# Altium PCB ADAS_ECU_MB_revA.PcbDoc (part 5 of 6)
Units mm, origin at the board's own origin, x right, y up, seen from the top; angles counter-clockwise.
Board outline 180 x 120 mm, 6 copper layers (Top Layer, Mid Layer 1, Mid Layer 2, Mid Layer 3, Mid Layer 4, Bottom Layer), stack 1.554 mm thick; 648 components, 505 nets, 4389 pads, 80 vias.
Unrouted connection lines stored in the file: 197.
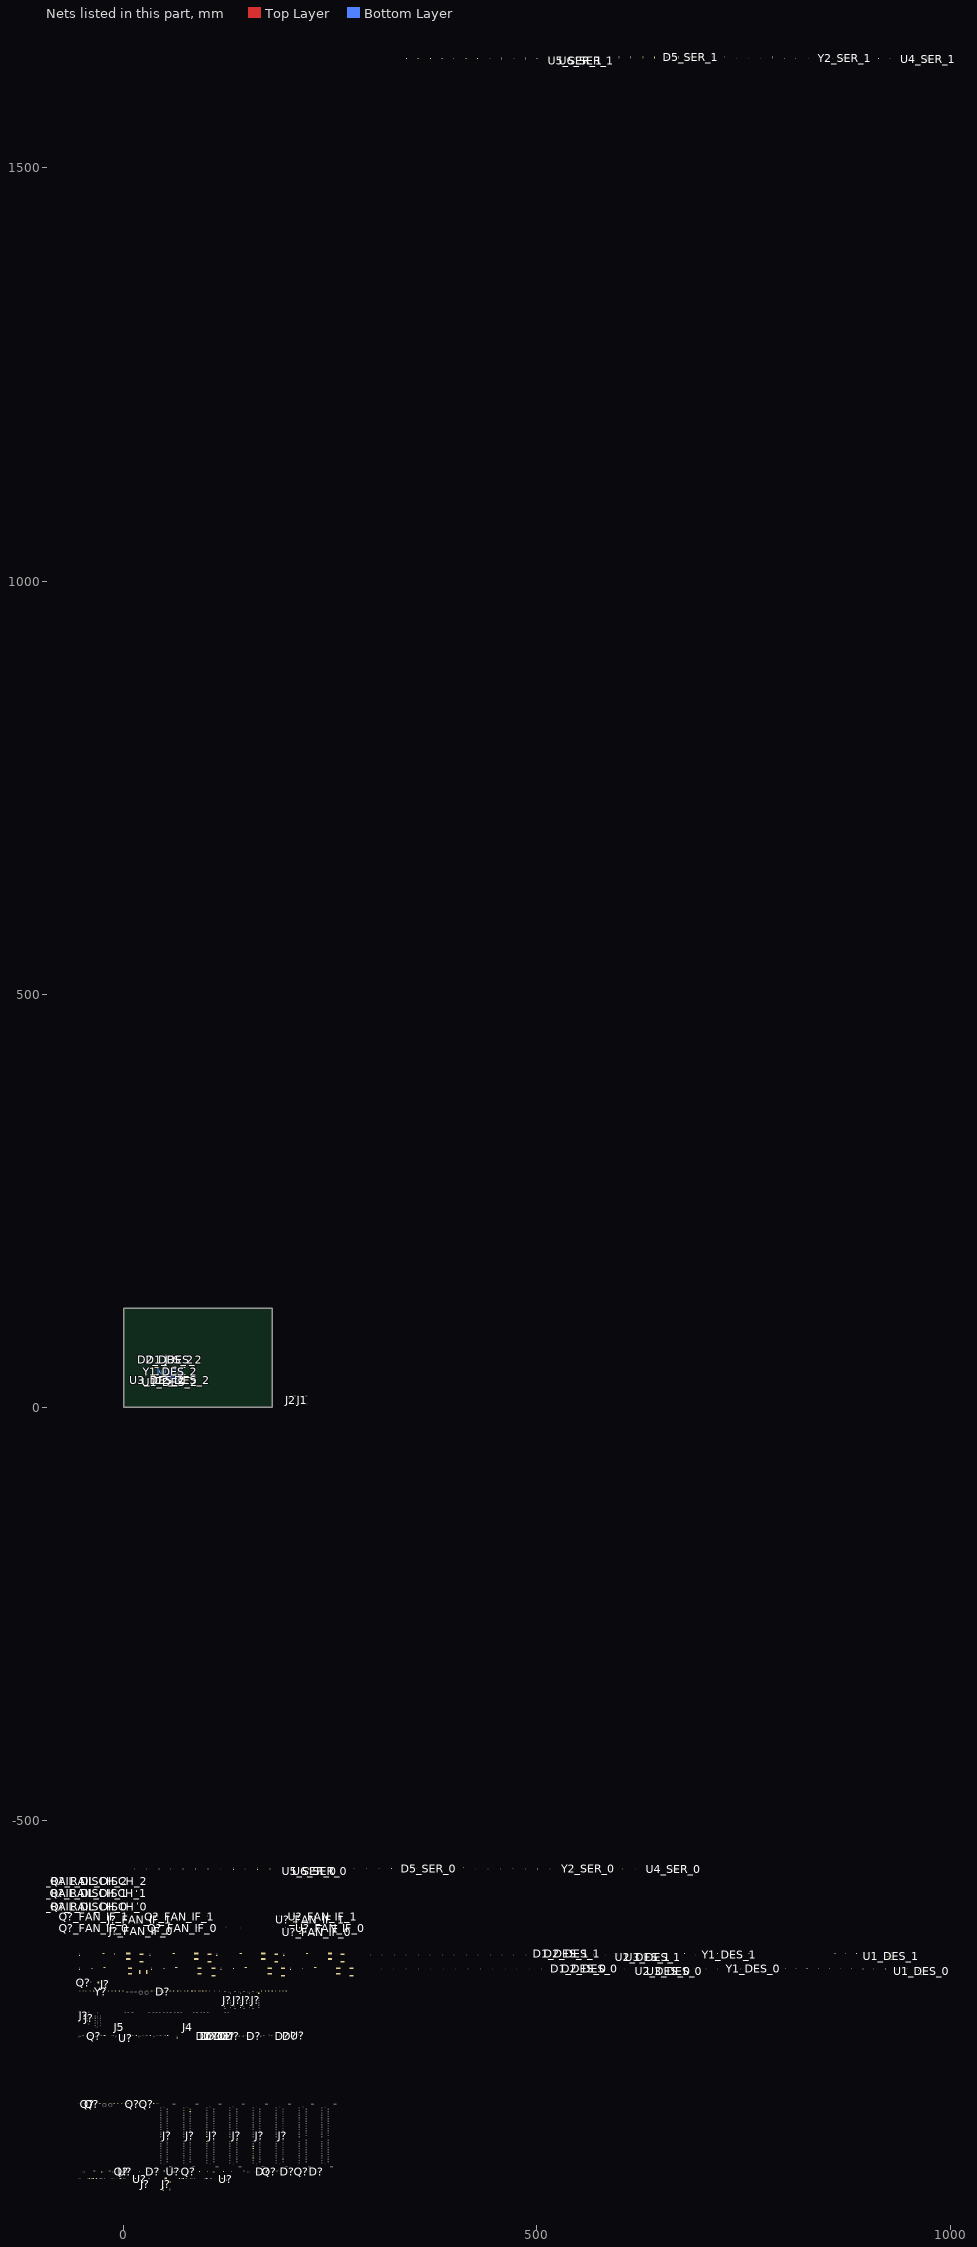
[diagram p4: the nets of this part, all layers, seen from the top]

## Via types
v1: diameter 0.5, hole 0.2, Top Layer to Bottom Layer, 66 vias
v2: diameter 0.5, hole 0.3, Top Layer to Bottom Layer, 12 vias
v3: diameter 0.75, hole 0.5, Top Layer to Bottom Layer, 2 vias

## Nets (pads, with @x,y where several pads share a name; then routed paths per layer and width w, separated by ;. In a path a pad name is that pad's centre, name@x,y a point inside that pad or via, vN(x,y) a via of type N, cw(c..) or ccw(c..) an arc to the next point about the centre after c; other vN are vias at no path point) (continued)
HDMI_D0_P: D?.1@198.211,-924.081 D?.10@199.046,-924.081 J?.7@-44.452,-737.871 R?.2@268.128,-924.081
HDMI_D1_N: D?.5@233.211,-926.081 D?.6@234.046,-926.081 J?.6@-44.452,-737.371 R?.2@276.128,-924.081
HDMI_D1_P: D?.4@233.211,-925.581 D?.7@234.046,-925.581 J?.4@-44.452,-736.371 R?.2@285.128,-924.081
HDMI_D2_N: D?.2@233.211,-924.581 D?.9@234.046,-924.581 R?.2@294.128,-924.081
HDMI_D2_P: D?.1@233.211,-924.081 D?.10@234.046,-924.081 J?.1@-44.452,-734.871 R?.2@302.128,-924.081
HDMI_HP_DET: C?.2@141.058,-924.081 D?.5@168.211,-926.081 D?.6@169.046,-926.081 J?.19@-44.452,-743.871 R?.2@155.128,-924.081
HDMI_nSLEEP: R?.2@7.353,-925.081 U?.5@60.753,-925.081
HDMI_SCL: D?.2@168.211,-924.581 D?.9@169.046,-924.581 J?.15@-44.452,-741.871 R?.2@181.128,-924.081
HDMI_SDA: D?.4@168.211,-925.581 D?.7@169.046,-925.581 J?.16@-44.452,-742.371 R?.2@220.128,-924.081
I2C0_SCL: D?.4@118.211,-761.581 D?.7@119.046,-761.581 J?.185@156.528,-895.706
I2C0_SDA: D?.5@118.211,-762.081 D?.6@119.046,-762.081 J?.187@156.528,-896.206
I2C1_SCL: J?.189@156.528,-896.706
I2C1_SDA: J?.191@156.528,-897.206
I2C_IO_VCC: C?.2@193.995,-924.081 Q?.1@175.678,-924.431 Q?.1@214.678,-924.431 R?.1@202.128,-924.081 R?.1@206.128,-924.081 R?.2@186.278,-924.081 R?.2@225.278,-924.081
I2S0_DIN: D?.2@96.211,-760.581 D?.9@97.046,-760.581 J?.195@156.528,-898.206 TP?.1@85.628,-759.081
I2S0_DOUT: D?.1@96.211,-760.081 D?.10@97.046,-760.081 J?.193@156.528,-897.706 TP?.1@79.628,-759.081
I2S0_FS: D?.4@96.211,-761.581 D?.7@97.046,-761.581 J?.197@156.528,-898.706 TP?.1@67.628,-759.081
I2S0_SCLK: D?.5@96.211,-762.081 D?.6@97.046,-762.081 J?.199@156.528,-899.206 TP?.1@57.628,-759.081
INT_VCC: F?_FAN_IF_0.1 F?_FAN_IF_1.1 J?.1@26.178,-934.081 J?.2@26.178,-936.081
MFP6_DES_0: R5_DES_0.1 R7_DES_0.2 U1_DES_0.25
MFP6_DES_1: R5_DES_1.1 R7_DES_1.2 U1_DES_1.25
MFP6_DES_2: R5_DES_2.1 R7_DES_2.2 U1_DES_2.25 | length 5.2
  Bottom Layer w0.2: U1_DES_2.25@59.977,32.003 60.225,32.25 62.25,32.25 62.75,31.75 63.75,31.75 R7_DES_2.2@64.54,32.54
MODULE_ID: J?.217@156.528,-903.706 R?.1@5.128,-842.081
nERRB_DES_0: U1_DES_0.14
nERRB_DES_1: U1_DES_1.14
nERRB_DES_2: U1_DES_2.14 | length 1.3
  Bottom Layer w0.2: U1_DES_2.14@55.558,35.538 55.558,35.552 55.274,35.836 55.274,36.024 v2(55.75,36.5)
NetC3_DES_0_2: C3_DES_0.2 R3_DES_0.2
NetC3_DES_1_2: C3_DES_1.2 R3_DES_1.2
NetC3_DES_2_2: C3_DES_2.2 R3_DES_2.2 | length 1.7
  Bottom Layer w0.199: C3_DES_2.2@62.338,36.338 R3_DES_2.2@63.54,37.54
NetC4_DES_0_2: C4_DES_0.2 R4_DES_0.2
NetC4_DES_1_2: C4_DES_1.2 R4_DES_1.2
NetC4_DES_2_2: C4_DES_2.2 R4_DES_2.2 | length 1.7
  Bottom Layer w0.199: C4_DES_2.2@61.338,37.338 R4_DES_2.2@62.54,38.54
NetC7_DES_0_2: C7_DES_0.2 R9_DES_0.2
NetC7_DES_1_2: C7_DES_1.2 R9_DES_1.2
NetC7_DES_2_2: C7_DES_2.2 R9_DES_2.2 | length 1.7
  Bottom Layer w0.199: R9_DES_2.2@49.46,38.54 C7_DES_2.2@50.662,37.338
NetC8_DES_0_2: C8_DES_0.2 R10_DES_0.2
NetC8_DES_1_2: C8_DES_1.2 R10_DES_1.2
NetC8_DES_2_2: C8_DES_2.2 R10_DES_2.2 | length 1.7
  Bottom Layer w0.199: R10_DES_2.2@48.46,37.54 C8_DES_2.2@49.662,36.338
NetC15_DES_0_2: C15_DES_0.2 C16_DES_0.2 U1_DES_0.8
NetC15_DES_1_2: C15_DES_1.2 C16_DES_1.2 U1_DES_1.8
NetC15_DES_2_2: C15_DES_2.2 C16_DES_2.2 U1_DES_2.8 | length 4.2
  Top Layer w0.3: v2(52,35.5) 52.038,35.462 52.361,35.462 C15_DES_2.2@53.162,34.662
  Bottom Layer w0.3: v2(52,35.5) 52,35.474 52.25,35.224 52.25,34.604 U1_DES_2.8@53.437,33.417
NetC17_DES_0_2: C17_DES_0.2 C18_DES_0.2 U1_DES_0.20
NetC17_DES_1_2: C17_DES_1.2 C18_DES_1.2 U1_DES_1.20
NetC17_DES_2_2: C17_DES_2.2 C18_DES_2.2 U1_DES_2.20 | length 4
  Top Layer w0.3: C17_DES_2.2@58.838,34.662 59.639,35.462 59.962,35.462 v2(60,35.5)
  Bottom Layer w0.3: U1_DES_2.20@58.21,33.77 59.901,35.462 59.962,35.462 v2(60,35.5)
NetC31_DES_0_1: C31_DES_0.1 L1_DES_0.2 L2_DES_0.1 R12_DES_0.2
NetC31_DES_1_1: C31_DES_1.1 L1_DES_1.2 L2_DES_1.1 R12_DES_1.2
NetC31_DES_2_1: C31_DES_2.1 L1_DES_2.2 L2_DES_2.1 R12_DES_2.2
NetC32_DES_0_1: C32_DES_0.1 L4_DES_0.2 L5_DES_0.1 R13_DES_0.2
NetC32_DES_1_1: C32_DES_1.1 L4_DES_1.2 L5_DES_1.1 R13_DES_1.2
NetC32_DES_2_1: C32_DES_2.1 L4_DES_2.2 L5_DES_2.1 R13_DES_2.2
  other v3: 57.25,48.453
NetC33_DES_0_1: C33_DES_0.1 L7_DES_0.2 L8_DES_0.1 R14_DES_0.2
NetC33_DES_1_1: C33_DES_1.1 L7_DES_1.2 L8_DES_1.1 R14_DES_1.2
NetC33_DES_2_1: C33_DES_2.1 L7_DES_2.2 L8_DES_2.1 R14_DES_2.2
NetC34_DES_0_1: C34_DES_0.1 L10_DES_0.2 L11_DES_0.1 R15_DES_0.2
NetC34_DES_1_1: C34_DES_1.1 L10_DES_1.2 L11_DES_1.1 R15_DES_1.2
NetC34_DES_2_1: C34_DES_2.1 L10_DES_2.2 L11_DES_2.1 R15_DES_2.2
  other v3: 54.75,48.453
NetC40_SER_0_2: C40_SER_0.2 R16_SER_0.2
NetC40_SER_1_2: C40_SER_1.2 R16_SER_1.2
NetC59_SER_0_1: C59_SER_0.1 C60_SER_0.1 C61_SER_0.1 U4_SER_0.14
NetC59_SER_1_1: C59_SER_1.1 C60_SER_1.1 C61_SER_1.1 U4_SER_1.14
NetC?_1: C?.1@-19.834,-932.081 C?.2@-33.005,-933.081 R?.2@5.053,-932.081 U?.8@20.378,-935.506
NetC?_2: C?.2@-49.005,-706.081 R?.1@-45.872,-706.081 R?.2@-35.872,-706.081 Y?.4
NetC?_FAN_IF_0_2: C?_FAN_IF_0.2@159.628,-630.714 F?_FAN_IF_0.2 U?_FAN_IF_0.1@231.348,-638.28
NetC?_FAN_IF_1_2: C?_FAN_IF_1.2@153.628,-616.714 F?_FAN_IF_1.2 U?_FAN_IF_1.1@223.348,-623.28
NetD?_1: D?.1@47.178,-706.281 R?.2@44.478,-706.081
NetD?_2: D?.2@34.678,-925.731 R?.1@47.903,-924.081
NetD?_3: D?.3@48.078,-707.881 R?.2@34.128,-706.081
NetD?_4: D?.4@48.078,-706.281 R?.2@39.478,-706.081
NetF1_DES_0_2: F1_DES_0.2 L1_DES_0.1
NetF1_DES_1_2: F1_DES_1.2 L1_DES_1.1
NetF1_DES_2_2: F1_DES_2.2 L1_DES_2.1
NetF2_DES_0_2: F2_DES_0.2 L4_DES_0.1
NetF2_DES_1_2: F2_DES_1.2 L4_DES_1.1
NetF2_DES_2_2: F2_DES_2.2 L4_DES_2.1
NetF3_DES_0_2: F3_DES_0.2 L7_DES_0.1
NetF3_DES_1_2: F3_DES_1.2 L7_DES_1.1
NetF3_DES_2_2: F3_DES_2.2 L7_DES_2.1
NetF4_DES_0_2: F4_DES_0.2 L10_DES_0.1
NetF4_DES_1_2: F4_DES_1.2 L10_DES_1.1
NetF4_DES_2_2: F4_DES_2.2 L10_DES_2.1
NetFB?_1: FB?.1 Q?.3@-1.422,-925.081
NetFB?_2: FB?.2@101.628,-923.681 R?.2@98.141,-924.081
NetJ?_2: J?.2@-48.372,-737.351 R?.2@-52.747,-731.081
NetJ?_4: J?.4@47.578,-947.181 R?.1@38.203,-932.081
NetJ?_5: J?.5@50.878,-932.981 R?.1@34.203,-932.081
NetJ?_68: J?.68@163.278,-709.581 R?.1@90.903,-706.081
NetL2_DES_0_2: L2_DES_0.2 L3_DES_0.1 R12_DES_0.1
NetL2_DES_1_2: L2_DES_1.2 L3_DES_1.1 R12_DES_1.1
NetL2_DES_2_2: L2_DES_2.2 L3_DES_2.1 R12_DES_2.1
NetL5_DES_0_2: L5_DES_0.2 L6_DES_0.1 R13_DES_0.1
NetL5_DES_1_2: L5_DES_1.2 L6_DES_1.1 R13_DES_1.1
NetL5_DES_2_2: L5_DES_2.2 L6_DES_2.1 R13_DES_2.1
NetL8_DES_0_2: L8_DES_0.2 L9_DES_0.1 R14_DES_0.1
NetL8_DES_1_2: L8_DES_1.2 L9_DES_1.1 R14_DES_1.1
NetL8_DES_2_2: L8_DES_2.2 L9_DES_2.1 R14_DES_2.1
NetL11_DES_0_2: L11_DES_0.2 L12_DES_0.1 R15_DES_0.1
NetL11_DES_1_2: L11_DES_1.2 L12_DES_1.1 R15_DES_1.1
NetL11_DES_2_2: L11_DES_2.2 L12_DES_2.1 R15_DES_2.1
NetQ?_1: Q?.1@77.678,-924.431 R?.2@109.353,-925.081 R?.2@113.128,-924.081
NetQ?_2: Q?.2@-44.322,-843.081 R?.2@-33.747,-842.081 R?.2@-52.647,-842.081
NetQ?_3: Q?.3@-34.422,-761.081 R?.1@-24.022,-760.081 R?.1@-31.997,-760.081
NetQ?_5: Q?.5@-37.422,-843.081 R?.2@-28.747,-842.081 R?.2@-47.647,-842.081
NetQ?_FAN_IF_0_1: Q?_FAN_IF_0.1@-36.022,-631.03 R?_FAN_IF_0.1@-54.372,-630.73 R?_FAN_IF_0.2@-18.372,-628.455
NetQ?_FAN_IF_0_2: Q?_FAN_IF_0.2@72.278,-631.03 R?_FAN_IF_0.2@34.628,-628.455 R?_FAN_IF_0.2@52.628,-629.43
NetQ?_FAN_IF_1_1: Q?_FAN_IF_1.1@-36.022,-617.03 R?_FAN_IF_1.1@-54.372,-615.73 R?_FAN_IF_1.2@-19.372,-614.455
NetQ?_FAN_IF_1_2: Q?_FAN_IF_1.2@68.278,-617.03 R?_FAN_IF_1.2@32.628,-614.455 R?_FAN_IF_1.2@49.628,-614.43
NetQ?_RAIL_DISCH_0_3: Q?_RAIL_DISCH_0.3@-28.722,-605.03 R?_RAIL_DISCH_0.1@16.628,-600.705
NetQ?_RAIL_DISCH_0_5: Q?_RAIL_DISCH_0.5@-29.372,-603.13 Q?_RAIL_DISCH_0.6@-54.022,-603.13 R?_RAIL_DISCH_0.1@-6.372,-600.805
NetQ?_RAIL_DISCH_1_3: Q?_RAIL_DISCH_1.3@-29.722,-589.03 R?_RAIL_DISCH_1.1@15.628,-585.705
NetQ?_RAIL_DISCH_1_5: Q?_RAIL_DISCH_1.5@-30.372,-587.13 Q?_RAIL_DISCH_1.6@-54.022,-587.13 R?_RAIL_DISCH_1.1@-7.372,-585.805
NetQ?_RAIL_DISCH_2_3: Q?_RAIL_DISCH_2.3@-28.722,-574.03 R?_RAIL_DISCH_2.1@16.628,-569.705
NetQ?_RAIL_DISCH_2_5: Q?_RAIL_DISCH_2.5@-29.372,-572.13 Q?_RAIL_DISCH_2.6@-54.022,-572.13 R?_RAIL_DISCH_2.1@-6.372,-570.805
NetR1_DES_0_2: R1_DES_0.2 U1_DES_0.17
NetR1_DES_1_2: R1_DES_1.2 U1_DES_1.17
NetR1_DES_2_2: R1_DES_2.2 U1_DES_2.17 | length 4.3
  Bottom Layer w0.2: U1_DES_2.17@57.149,34.831 57.9,35.582 57.9,37.9 R1_DES_2.2@58.54,38.54
NetR17_SER_0_2: R17_SER_0.2 U4_SER_0.10
NetR17_SER_1_2: R17_SER_1.2 U4_SER_1.10
NetR18_SER_0_2: R18_SER_0.2 U4_SER_0.31
NetR18_SER_1_2: R18_SER_1.2 U4_SER_1.31
NetR19_SER_0_2: R19_SER_0.2 U4_SER_0.32
NetR19_SER_1_2: R19_SER_1.2 U4_SER_1.32
NetR20_SER_0_1: R20_SER_0.1 U4_SER_0.1
NetR20_SER_1_1: R20_SER_1.1 U4_SER_1.1
NetR21_SER_0_2: R21_SER_0.2
NetR21_SER_1_2: R21_SER_1.2
NetR22_SER_0_2: R22_SER_0.2
NetR22_SER_1_2: R22_SER_1.2
NetR23_SER_0_1: R23_SER_0.1 R24_SER_0.2
NetR23_SER_1_1: R23_SER_1.1 R24_SER_1.2
NetR?_1: R?.1@117.878,-933.081 U?.9@125.053,-934.831
NetR?_2: R?.2@83.128,-706.081
NetR?_FAN_IF_0_1: R?_FAN_IF_0.1@195.628,-630.805 U?_FAN_IF_0.6
NetR?_FAN_IF_0_2: R?_FAN_IF_0.2@106.628,-629.355 R?_FAN_IF_0.2@141.628,-628.455 U?_FAN_IF_0.5
NetR?_FAN_IF_1_1: R?_FAN_IF_1.1@188.628,-616.805 U?_FAN_IF_1.6
NetR?_FAN_IF_1_2: R?_FAN_IF_1.2@101.628,-615.355 R?_FAN_IF_1.2@135.628,-614.455 U?_FAN_IF_1.5
nFORCE_RECOVERY: J?.1@64.628,-763.351 J?.214@192.728,-902.956 R?.1@52.903,-760.081
nLOCK_DES_0: U1_DES_0.13
nLOCK_DES_1: U1_DES_1.13
nLOCK_DES_2: U1_DES_2.13 | length 1.6
  Bottom Layer w0.2: v2(55,36.5) 55,36.483 54.75,36.233 54.75,35.639 U1_DES_2.13@55.205,35.185
nMOD_SLEEP: J?.178@192.728,-893.956
nPWDN_DES_0: R2_DES_0.1 U1_DES_0.11
nPWDN_DES_1: R2_DES_1.1 U1_DES_1.11
nPWDN_DES_2: R2_DES_2.1 U1_DES_2.11 | length 4.5
  Bottom Layer w0.2: R2_DES_2.1@53.46,38.54 53.46,38.151 53.82,37.791 53.82,35.155 U1_DES_2.11@54.497,34.477
nSDMODE_1: R?.1@70.728,-933.081 U?.4@122.203,-934.831
nSDMODE_2: R?.1@-38.272,-933.081 U?.4@18.203,-934.831
nSHUTDOWN_REQ: J?.233@156.528,-907.706
nSYS_RESET: J?.239@156.528,-909.206
PCIE0_CLK_N: C?.2@99.995,-706.081
PCIE0_CLK_P: C?.2@95.995,-706.081
PCIE0_nCLKREQ: J?.180@192.728,-894.456
PCIE0_nRST: D?.2@118.211,-760.581 D?.9@119.046,-760.581 J?.181@156.528,-894.706
PCIE0_RX0_N: D?.1@122.211,-760.081 D?.10@123.046,-760.081 J?.131@100.528,-880.206
PCIE0_RX0_P: D?.2@122.211,-760.581 D?.9@123.046,-760.581 J?.133@100.528,-880.706
PCIE0_RX1_N: D?.4@122.211,-761.581 D?.7@123.046,-761.581 J?.137@100.528,-881.706
PCIE0_RX1_P: D?.5@122.211,-762.081 D?.6@123.046,-762.081 J?.139@100.528,-882.206
PCIE0_RX2_N: D?.4@101.211,-761.581 D?.7@102.046,-761.581 J?.149@100.528,-886.706
PCIE0_RX2_P: D?.5@101.211,-762.081 D?.6@102.046,-762.081 J?.151@100.528,-887.206
PCIE0_RX3_N: D?.1@105.211,-760.081 D?.10@106.046,-760.081 J?.155@100.528,-888.206
PCIE0_RX3_P: D?.2@105.211,-760.581 D?.9@106.046,-760.581 J?.157@100.528,-888.706
PCIE0_TX0_N: C?.2@171.995,-706.081
PCIE0_TX0_P: C?.2@166.995,-706.081
PCIE0_TX1_N: C?.2@179.995,-706.081
PCIE0_TX1_P: D?.5@131.211,-762.081 D?.6@132.046,-762.081 J?.142@136.728,-882.956
PCIE0_TX2_N: D?.1@126.211,-760.081 D?.10@127.046,-760.081 J?.148@136.728,-886.456
PCIE0_TX2_P: D?.2@126.211,-760.581 D?.9@127.046,-760.581 J?.150@136.728,-886.956
PCIE0_TX3_N: D?.4@126.211,-761.581 D?.7@127.046,-761.581 J?.154@136.728,-887.956
PCIE0_TX3_P: C?.2@192.995,-706.081
PCIE_32K_CLK: R?.1@213.978,-760.081 U?.4@211.398,-760.731
PCIE_CLKREQ: J?.52@163.278,-713.581 R?.1@82.128,-706.081
PCIE_RST: J?.50@163.278,-714.081 R?.1@51.978,-706.081 R?.1@86.128,-706.081
PCIE_RX0_N: J?.41@144.728,-716.331
PCIE_RX0_P: J?.43@144.728,-715.831
PCIE_RX1_N: J?.29@121.728,-719.331
PCIE_RX1_P: J?.31@121.728,-718.831
PCIE_RX2_N: J?.17@121.728,-722.331
PCIE_RX2_P: J?.19@121.728,-721.831
PCIE_RX3_N: J?.5@121.728,-725.331
PCIE_RX3_P: J?.7@121.728,-724.831
PCIE_WAKE: D?.1@118.211,-760.081 D?.10@119.046,-760.081 J?.179@156.528,-894.206
PLDWN_1: C?.2@297.995,-924.081 R?.1@126.116,-924.081 R?.1@301.128,-924.081
PLDWN_2: C?.2@288.995,-924.081 R?.1@116.116,-924.081 R?.1@293.128,-924.081
PLDWN_3: C?.2@279.995,-924.081 R?.1@97.116,-924.081 R?.1@284.128,-924.081
PLDWN_4: C?.2@271.995,-924.081 R?.1@82.116,-924.081 R?.1@275.128,-924.081
PLDWN_5: C?.2@262.995,-924.081 R?.1@63.116,-924.081 R?.1@267.128,-924.081
PLDWN_6: C?.2@253.995,-924.081 R?.1@44.116,-924.081 R?.1@258.128,-924.081
PLDWN_7: C?.2@245.995,-924.081 R?.1@25.116,-924.081 R?.1@249.128,-924.081
PLDWN_8: C?.2@236.995,-924.081 R?.1@14.116,-924.081 R?.1@241.128,-924.081
PMIC_BBAT: J?.235@156.528,-908.206 TP?.1@73.628,-759.081
PoC_A_DES_0: C1_DES_0.2 D1_DES_0.1 D1_DES_0.10 J1.4 L3_DES_0.2
PoC_A_DES_1: C1_DES_1.2 D1_DES_1.1 D1_DES_1.10 J2.4 L3_DES_1.2
PoC_A_DES_2: C1_DES_2.2 D1_DES_2.1 D1_DES_2.10 J3.4 L3_DES_2.2 | length 19.4
  Bottom Layer w0.199: C1_DES_2.2@63.338,35.338 65.416,37.416 cw(c66.5,36.332) L3_DES_2.2@66.5,37.865 68.365,37.865 ccw(c68.365,40) 70.5,40 70.5,50
PoC_B_DES_0: C2_DES_0.2 D1_DES_0.5 D1_DES_0.6 J1.3 L6_DES_0.2
PoC_B_DES_1: C2_DES_1.2 D1_DES_1.5 D1_DES_1.6 J2.3 L6_DES_1.2
PoC_B_DES_2: C2_DES_2.2 D1_DES_2.5 D1_DES_2.6 J3.3 L6_DES_2.2 | length 12.6
  Bottom Layer w0.199: C2_DES_2.2@60.338,38.338 62.141,40.141 ccw(c60.345,41.937) 62.885,41.937 L6_DES_2.2@62.885,42.5 ccw(c62.607,42.778) 63,42.778 63,50
PoC_C_DES_0: C5_DES_0.2 D2_DES_0.1 D2_DES_0.10 J1.2 L12_DES_0.2
PoC_C_DES_1: C5_DES_1.2 D2_DES_1.1 D2_DES_1.10 J2.2 L12_DES_1.2
PoC_C_DES_2: C5_DES_2.2 D2_DES_2.1 D2_DES_2.10 J3.2 L12_DES_2.2 | length 12.6
  Bottom Layer w0.199: 49,50 49,42.778 ccw(c49.393,42.778) 49.115,42.5 49.115,41.937 ccw(c51.655,41.937) 49.859,40.141 C5_DES_2.2@51.662,38.338
PoC_D_DES_0: C6_DES_0.2 D2_DES_0.5 D2_DES_0.6 J1.1 L9_DES_0.2
PoC_D_DES_1: C6_DES_1.2 D2_DES_1.5 D2_DES_1.6 J2.1 L9_DES_1.2
PoC_D_DES_2: C6_DES_2.2 D2_DES_2.5 D2_DES_2.6 J3.1 L9_DES_2.2 | length 19.4
  Bottom Layer w0.199: 41.5,50 41.5,40 ccw(c43.635,40) 43.635,37.865 L9_DES_2.2@45.5,37.865 cw(c45.5,36.332) 46.584,37.416 C6_DES_2.2@48.662,35.338
PoC_PWR_DES_0: F1_DES_0.1 F2_DES_0.1 F3_DES_0.1 F4_DES_0.1
PoC_PWR_DES_1: F1_DES_1.1 F2_DES_1.1 F3_DES_1.1 F4_DES_1.1
PoC_PWR_DES_2: F1_DES_2.1 F2_DES_2.1 F3_DES_2.1 F4_DES_2.1
PoC_TAP_SER_0: C36_SER_0.2 D5_SER_0.1 D5_SER_0.10 J4.1 R23_SER_0.2
PoC_TAP_SER_1: C36_SER_1.2 D5_SER_1.1 D5_SER_1.10 J5.1 R23_SER_1.2
POWER_EN: J?.237@156.528,-908.706
PRE_CLK_N: C?.1@99.262,-706.081 J?.53@144.728,-713.331
PRE_CLK_P: C?.1@95.262,-706.081 J?.55@144.728,-712.831
PRE_CSI0_D1_N: D?.1@157.211,-760.081 D?.10@158.046,-760.081 J?.16@80.728,-851.456 R?.1@1.128,-842.081
PRE_CSI0_D1_P: D?.2@157.211,-760.581 D?.9@158.046,-760.581 J?.18@80.728,-851.956 R?.1@-2.872,-842.081
PRE_CSI1_D0_N: D?.1@192.211,-760.081 D?.10@193.046,-760.081 J?.3@44.528,-848.206 R?.1@-7.872,-842.081
PRE_CSI1_D0_P: D?.2@192.211,-760.581 D?.9@193.046,-760.581 J?.5@44.528,-848.706 R?.1@-11.872,-842.081
PRE_FAN_PWM_FAN_IF_0: J?_FAN_IF_0.4 Q?_FAN_IF_0.3@-35.372,-629.13 R?_FAN_IF_0.2@-0.372,-629.43
PRE_FAN_PWM_FAN_IF_1: J?_FAN_IF_1.4 Q?_FAN_IF_1.3@-35.372,-615.13 R?_FAN_IF_1.2@-2.372,-614.43
PRE_FAN_TACH_FAN_IF_0: J?_FAN_IF_0.3 Q?_FAN_IF_0.3@71.628,-629.13 R?_FAN_IF_0.2@88.628,-629.43
PRE_FAN_TACH_FAN_IF_1: J?_FAN_IF_1.3 Q?_FAN_IF_1.3@67.628,-615.13 R?_FAN_IF_1.2@84.628,-614.43
PRE_PCIE_32K_CLK: J?.210@192.728,-901.956 U?.2@209.858,-760.081
PRE_PCIE_WAKE: J?.54@163.278,-713.081 R?.1@77.128,-706.081
PRE_TX0_N: C?.1@171.262,-706.081 J?.47@144.728,-714.831
PRE_TX0_P: C?.1@166.262,-706.081 J?.49@144.728,-714.331
PRE_TX1_N: C?.1@179.262,-706.081 J?.35@121.728,-717.831
PRE_TX1_P: C?.1@175.262,-706.081 J?.37@144.728,-717.331
PRE_TX2_N: C?.1@188.262,-706.081 J?.23@121.728,-720.831
PRE_TX2_P: C?.1@183.262,-706.081 J?.25@121.728,-720.331
PRE_TX3_N: C?.1@196.262,-706.081 J?.11@121.728,-723.831
PRE_TX3_P: C?.1@192.262,-706.081 J?.13@121.728,-723.331
PU_VCC: R?.2@44.053,-932.081 R?.2@67.353,-933.081 R?.2@72.528,-933.081 R?.2@-36.472,-933.081 R?.2@-41.647,-933.081
RAIL_ENABLE_RAIL_DISCH_0: Q?_RAIL_DISCH_0.2@-53.372,-605.03
RAIL_ENABLE_RAIL_DISCH_1: Q?_RAIL_DISCH_1.2@-53.372,-589.03
RAIL_ENABLE_RAIL_DISCH_2: Q?_RAIL_DISCH_2.2@-53.372,-574.03
RAIL_RAIL_DISCH_0: C?.1@-13.174,-925.081 C?.2@-22.005,-924.081 R?.1@4.203,-932.081 R?.1@8.203,-932.081 R?.1@43.203,-932.081 R?.1@108.203,-932.081 R?.1@113.203,-932.081 R?.2@-6.647,-925.081 R?_FAN_IF_0.1@88.628,-630.73 R?_FAN_IF_0.1@283.628,-629.58 R?_FAN_IF_0.1@-0.372,-630.73 R?_FAN_IF_0.2@265.628,-628.58 R?_FAN_IF_1.1@84.628,-615.73 R?_FAN_IF_1.1@274.628,-615.58 R?_FAN_IF_1.1@-2.372,-615.73 R?_FAN_IF_1.2@256.628,-614.58 R?_RAIL_DISCH_0.2@16.628,-599.455 U?.4@2.753,-925.731
RAIL_RAIL_DISCH_1: C11_DES_0.2 C11_DES_1.2 C11_DES_2.2 C13_DES_0.2 C13_DES_1.2 C13_DES_2.2 C27_DES_0.2 C27_DES_1.2 C27_DES_2.2 C28_DES_0.2 C28_DES_1.2 C28_DES_2.2 C49_SER_0.2 C49_SER_1.2 C51_SER_0.2 C51_SER_1.2 C53_SER_0.1 C53_SER_1.1 C54_SER_0.1 C54_SER_1.1 C?.1@3.826,-707.081 C?.1@8.826,-707.081 C?.1@13.826,-707.081 C?.2@-1.005,-706.081 C?.2@-5.005,-706.081 C?.2@-10.005,-706.081 C?.2@-14.005,-706.081 C?.2@-18.005,-706.081 C?.2@-23.005,-706.081 D?.2@47.178,-707.881 J?.2@141.278,-726.081 J?.4@141.278,-725.581 J?.12@141.278,-723.581 J?.14@141.278,-723.081 J?.16@141.278,-722.581 J?.18@141.278,-722.081 J?.70@163.278,-709.081 J?.72@163.278,-708.581 J?.74@163.278,-708.081 R2_DES_0.2 R2_DES_1.2 R2_DES_2.2 R5_DES_0.2 R5_DES_1.2 R5_DES_2.2 R6_DES_0.2 R6_DES_1.2 R6_DES_2.2 R20_SER_0.2 R20_SER_1.2 R25_SER_0.2 R25_SER_1.2 R26_SER_0.2 R26_SER_1.2 R?.1@-36.872,-706.081 R?.1@-40.872,-924.081 R?.2@15.278,-760.081 R?.2@32.278,-760.081 R?.2@41.353,-925.081 R?.2@50.278,-760.081 R?.2@53.278,-706.081 R?.2@215.278,-760.081 R?.2@-22.722,-760.081 R?.2@-39.722,-760.081 R?_RAIL_DISCH_1.2@15.628,-584.455 U1_DES_0.24 U1_DES_1.24 U1_DES_2.24 U2_DES_0.3 U2_DES_1.3 U2_DES_2.3 U3_DES_0.3 U3_DES_1.3 U3_DES_2.3 U4_SER_0.16 U4_SER_1.16 U5_SER_0.3 U5_SER_1.3 U6_SER_0.3 U6_SER_1.3 U?.4@60.753,-925.731 | length 4.8
  Bottom Layer w0.3: U1_DES_2.24@59.624,32.356 59.882,32.614 62.365,32.614 62.479,32.5 v2(63,32.5) 62.998,32.502 62.998,32.892 63.54,33.434 R5_DES_2.2@63.54,33.54
RAIL_RAIL_DISCH_2: C?.2@-19.005,-760.081 R?_RAIL_DISCH_2.2@16.628,-568.455 U?.3@-0.322,-765.381
REC_VBUS: C?.1@-30.847,-696.081 C?.2@-35.005,-695.081 J?.1@-23.197,-699.381 Q?.1@-49.322,-695.431 R?.2@-52.647,-695.081
SER_1V2_SER_0: C52_SER_0.1 C57_SER_0.1 C58_SER_0.1 R29_SER_0.2 U4_SER_0.15 U6_SER_0.2 U6_SER_0.4
SER_1V2_SER_1: C52_SER_1.1 C57_SER_1.1 C58_SER_1.1 R29_SER_1.2 U4_SER_1.15 U6_SER_1.2 U6_SER_1.4
SER_1V8_SER_0: C50_SER_0.1 C55_SER_0.1 C56_SER_0.1 U4_SER_0.11 U5_SER_0.2 U5_SER_0.4
SER_1V8_SER_1: C50_SER_1.1 C55_SER_1.1 C56_SER_1.1 U4_SER_1.11 U5_SER_1.2 U5_SER_1.4
SIO_SER_0_N: C40_SER_0.1 U4_SER_0.13
SIO_SER_0_P: C36_SER_0.1 U4_SER_0.12
SIO_SER_1_N: C40_SER_1.1 U4_SER_1.13
SIO_SER_1_P: C36_SER_1.1 U4_SER_1.12
SIOA_DES_0_N: C3_DES_0.1 U1_DES_0.22
SIOA_DES_0_P: C1_DES_0.1 U1_DES_0.23
SIOA_DES_1_N: C3_DES_1.1 U1_DES_1.22
SIOA_DES_1_P: C1_DES_1.1 U1_DES_1.23
SIOA_DES_2_N: C3_DES_2.1 U1_DES_2.22 | length 4.4
  Bottom Layer w0.163: U1_DES_2.22@58.917,33.063 59.181,33.327 59.278,33.327 59.983,34.033 60.776,34.033 61.77,35.027 61.77,35.163 61.646,35.286 61.646,35.646 C3_DES_2.1@61.662,35.662
SIOA_DES_2_P: C1_DES_2.1 U1_DES_2.23 | length 4.4
  Bottom Layer w0.163: U1_DES_2.23@59.27,32.71 59.534,32.974 59.534,33.07 60.134,33.67 60.926,33.67 62.027,34.77 62.163,34.77 62.286,34.646 62.646,34.646 C1_DES_2.1@62.662,34.662
SIOB_DES_0_N: C4_DES_0.1 U1_DES_0.19
SIOB_DES_0_P: C2_DES_0.1 U1_DES_0.18
SIOB_DES_1_N: C4_DES_1.1 U1_DES_1.19
SIOB_DES_1_P: C2_DES_1.1 U1_DES_1.18
SIOB_DES_2_N: C4_DES_2.1 U1_DES_2.19 | length 4.2
  Bottom Layer w0.163: U1_DES_2.19@57.856,34.124 58.12,34.388 58.12,34.485 58.929,35.294 58.929,35.672 60.027,36.77 60.163,36.77 60.286,36.646 60.646,36.646 C4_DES_2.1@60.662,36.662
SIOB_DES_2_P: C2_DES_2.1 U1_DES_2.18 | length 4.2
  Bottom Layer w0.163: U1_DES_2.18@57.503,34.477 57.767,34.742 57.863,34.742 58.566,35.444 58.566,35.823 59.77,37.027 59.77,37.163 59.646,37.286 59.646,37.646 C2_DES_2.1@59.662,37.662
SIOC_DES_0_N: C7_DES_0.1 U1_DES_0.9
SIOC_DES_0_P: C5_DES_0.1 U1_DES_0.10
SIOC_DES_1_N: C7_DES_1.1 U1_DES_1.9
SIOC_DES_1_P: C5_DES_1.1 U1_DES_1.10
SIOC_DES_2_N: C7_DES_2.1 U1_DES_2.9 | length 4.4
  Bottom Layer w0.163: C7_DES_2.1@51.338,36.662 51.354,36.646 51.714,36.646 51.837,36.77 51.973,36.77 52.894,35.849 52.894,34.763 53.526,34.131 53.526,34.034 U1_DES_2.9@53.79,33.77
SIOC_DES_2_P: C5_DES_2.1 U1_DES_2.10 | length 4.4
  Bottom Layer w0.163: C5_DES_2.1@52.338,37.662 52.354,37.646 52.354,37.286 52.23,37.163 52.23,37.027 53.257,36 53.257,34.914 53.783,34.388 53.88,34.388 U1_DES_2.10@54.144,34.124
SIOD_DES_0_N: C8_DES_0.1 U1_DES_0.6
SIOD_DES_0_P: C6_DES_0.1 U1_DES_0.5
SIOD_DES_1_N: C8_DES_1.1 U1_DES_1.6
SIOD_DES_1_P: C6_DES_1.1 U1_DES_1.5
SIOD_DES_2_N: C8_DES_2.1 U1_DES_2.6 | length 4.1
  Bottom Layer w0.163: C8_DES_2.1@50.338,35.662 50.354,35.646 50.354,35.286 50.273,35.205 50.273,35.07 51.487,33.856 52.369,32.974 52.466,32.974 U1_DES_2.6@52.73,32.71
SIOD_DES_2_P: C6_DES_2.1 U1_DES_2.5 | length 4.2
  Bottom Layer w0.163: C6_DES_2.1@49.338,34.662 49.354,34.646 49.714,34.646 49.88,34.813 50.016,34.813 51.336,33.493 52.112,32.717 52.112,32.62 U1_DES_2.5@52.376,32.356
SLEEP/nWAKE: J?.240@192.728,-909.456 R?.2@93.353,-760.081
SMB_CLK: J?.40@163.278,-716.581 R?.1@69.128,-706.081 TP?.1@115.628,-706.081
SMB_DATA: J?.42@163.278,-716.081 R?.1@73.128,-706.081 TP?.1@109.628,-706.081
SMB_nALERT: J?.44@163.278,-715.581 R?.1@60.128,-706.081 R?.1@64.978,-706.081 TP?.1@103.628,-706.081
SUSCLK_32: R?.1@56.128,-706.081 R?.1@-32.872,-706.081 R?.2@92.353,-706.081
UART2_RXD: J?.238@192.728,-908.956 Q?.2@26.678,-843.731 R?.1@35.978,-842.081
UART2_TXD: J?.236@192.728,-908.456 Q?.2@9.678,-843.731 R?.1@17.978,-842.081
USB0_D_N: D?.1@201.211,-760.081 D?.10@202.046,-760.081 J?.109@100.528,-874.706
USB0_D_P: D?.2@201.211,-760.581 D?.9@202.046,-760.581 J?.111@100.528,-875.206
USB1_D_N: D?.4@201.211,-761.581 D?.7@202.046,-761.581 J?.115@100.528,-876.206
USB1_D_P: D?.5@201.211,-762.081 D?.6@202.046,-762.081 J?.117@100.528,-876.706
USBSS0_RX_N: D?.4@105.211,-761.581 D?.7@106.046,-761.581 J?.161@156.528,-889.706
USBSS0_RX_P: D?.5@105.211,-762.081 D?.6@106.046,-762.081 J?.163@156.528,-890.206
USBSS0_TX_N: D?.4@109.211,-761.581 D?.7@110.046,-761.581 J?.166@192.728,-890.956
USBSS0_TX_P: D?.5@109.211,-762.081 D?.6@110.046,-762.081 J?.168@192.728,-891.456
VBUS_DETECT: J?.87@100.528,-869.206
VDD_3V3_HDMI: Q?.1@-3.322,-924.431 R?.1@112.128,-924.081 R?.1@-35.997,-924.081 R?.2@49.353,-924.081 R?.2@203.128,-924.081 R?.2@-16.722,-924.081 U?.2@58.503,-925.081 U?.3@58.503,-925.731
VDD_5V_HDMI: C?.1@-27.174,-925.081 C?.2@-31.005,-924.081 J?.18@-44.452,-743.371 R?.2@190.253,-924.081 R?.2@229.253,-924.081 U?.2@0.503,-925.081 U?.3@0.503,-925.731
VOUT_L: C?.2@100.528,-933.081 J?.3@55.678,-937.081 J?.7@26.178,-946.081 R?.2@35.053,-932.081 R?.2@119.378,-933.081
VOUT_R: C?.2@-3.472,-933.081 J?.2@47.578,-944.481 J?.6@26.178,-944.081 R?.2@14.378,-933.081 R?.2@39.053,-932.081
X25_DES_0_N: C10_DES_0.2 U1_DES_0.16 Y1_DES_0.3
X25_DES_0_P: C9_DES_0.2 U1_DES_0.15 Y1_DES_0.1
X25_DES_1_N: C10_DES_1.2 U1_DES_1.16 Y1_DES_1.3
X25_DES_1_P: C9_DES_1.2 U1_DES_1.15 Y1_DES_1.1
X25_DES_2_N: C10_DES_2.2 U1_DES_2.16 Y1_DES_2.3 | length 10.9
  Bottom Layer w0.2: U1_DES_2.16@56.795,35.185 57.053,35.442 57.053,35.591 57.353,35.892 57.353,37.2 56.144,38.409 56.144,39.529 56.262,39.646 ; Y1_DES_2.3@57.1,42.15 56.6,42.65 56.195,42.65 56.078,42.533 56.078,41.387 56.144,41.32 56.144,39.764 56.262,39.646 ; C10_DES_2.2@57.662,39.662 57.646,39.646 56.262,39.646
X25_DES_2_P: C9_DES_2.2 U1_DES_2.15 Y1_DES_2.1 | length 11.1
  Bottom Layer w0.2: C9_DES_2.2@54.338,39.662 54.354,39.646 55.738,39.646 ; Y1_DES_2.1@54.9,43.85 55,43.85 55.791,43.059 55.791,42.654 55.789,42.653 55.789,41.267 55.856,41.201 55.856,39.764 55.738,39.646 ; U1_DES_2.15@56.442,35.538 56.699,35.795 56.848,35.795 57.065,36.012 57.065,37.08 55.856,38.289 55.856,39.529 55.738,39.646
X25_SER_0_N: C45_SER_0.1 U4_SER_0.9 Y2_SER_0.3
X25_SER_0_P: C44_SER_0.1 U4_SER_0.8 Y2_SER_0.1
X25_SER_1_N: C45_SER_1.1 U4_SER_1.9 Y2_SER_1.3
X25_SER_1_P: C44_SER_1.1 U4_SER_1.8 Y2_SER_1.1